# EAGLE board dsub (EAGLE 9.5.1)
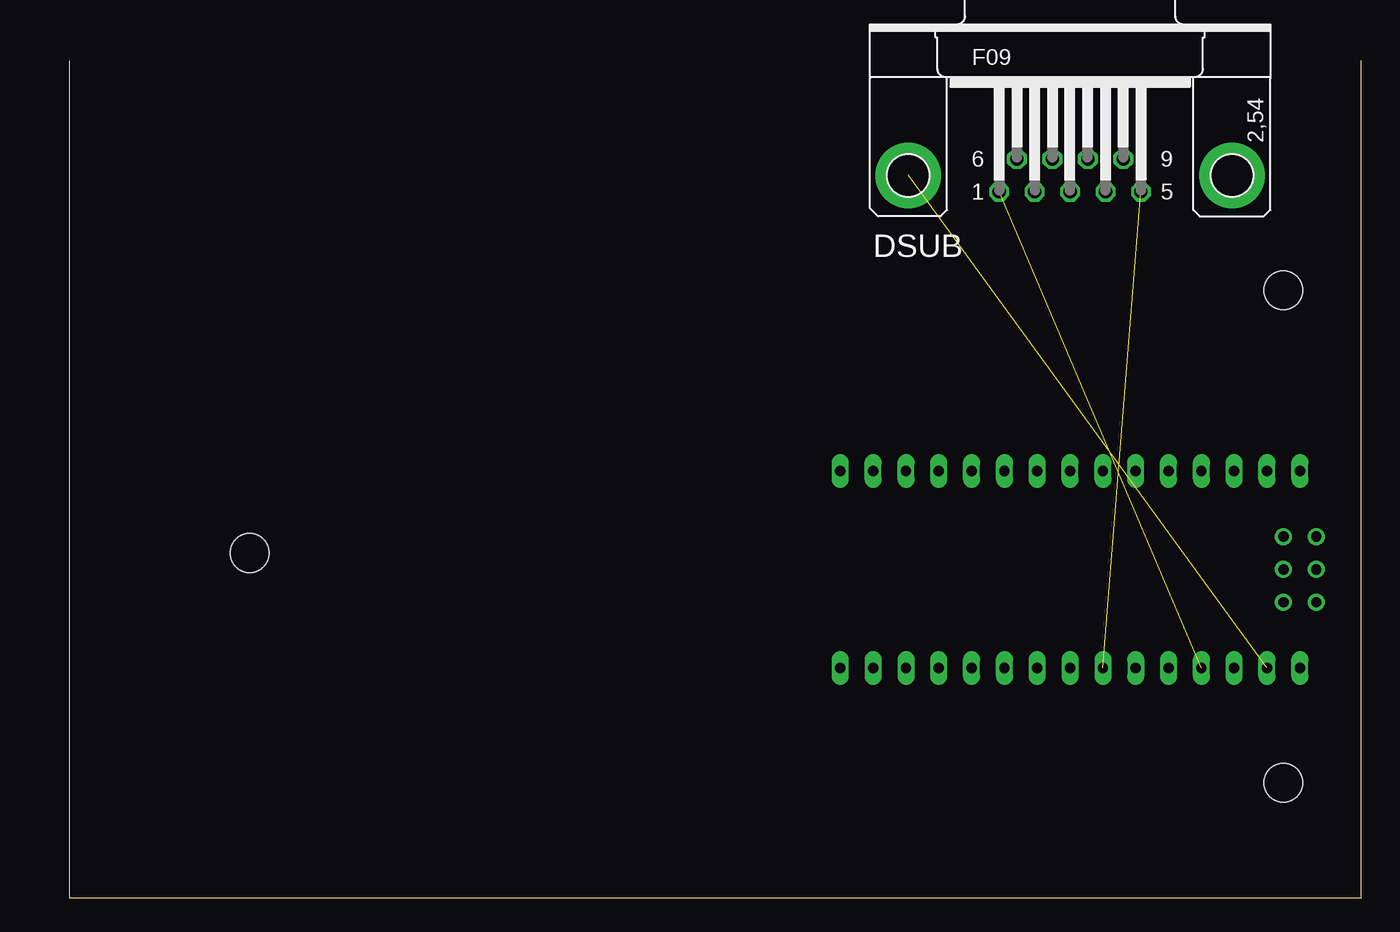
[diagram p0: board, top side]
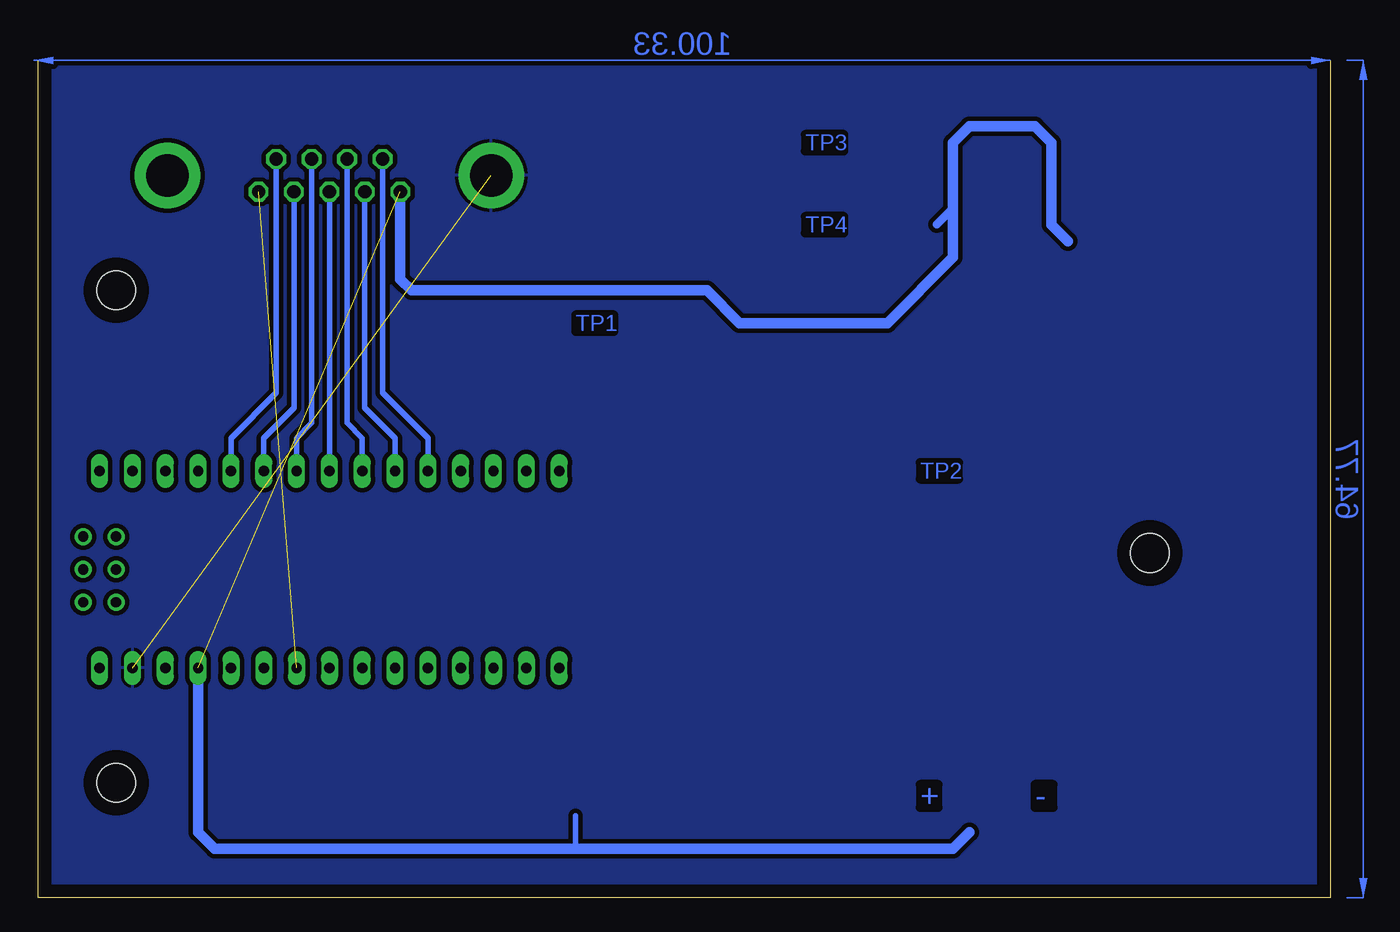
[diagram p1: board, bottom side, seen from below]

Size 100 x 64.76 mm. Coordinates in mm from the lower left corner, seen from the top.
Outline: 100,64.76 100,0 0,0 0,64.76
Copper layers (1*16): Top 0.035mm / dielectric 1.5mm / Bottom 0.035mm
Design rules "default *": minimum track width 6mil, minimum drill 0.35mm, track to track 6mil, track to pad 6mil, pad to pad 6mil, via to via 6mil, smd to smd 6mil, copper to edge 40mil, drill to drill 6mil, minimum pad ring 10mil, minimum via ring 8mil, stop-mask expansion 4mil, vias tented up to drill 0mil, thermal gap 10mil
Holes 3 mm at 13.97,26.67 93.98,8.89 93.98,46.99

## Footprints (pad centres in the part's own frame; a part is rotated, then mirrored left to right if it is on the bottom)
F09HP = drill 1.016 octagon: 1 -5.486,-1.27; 2 -2.743,-1.27; 3 0,-1.27; 4 2.743,-1.27; 5 5.486,-1.27; 6 -4.115,1.27; 7 -1.372,1.27; 8 1.372,1.27; 9 4.115,1.27 | drill 3.302 pad 5.08: G1 -12.522,0; G2 12.522,0
NANO = drill 0.8 long: 3.3V -10.16,24.13; 5V -10.16,-1.27; A0 -10.16,19.05; A1 -10.16,16.51; A2 -10.16,13.97; A3 -10.16,11.43; A4 -10.16,8.89; A5 -10.16,6.35; A6 -10.16,3.81; A7 -10.16,1.27; AREF -10.16,21.59; D2 5.08,1.27; D3 5.08,3.81; D4 5.08,6.35; D5 5.08,8.89; D6 5.08,11.43; D7 5.08,13.97; D8 5.08,16.51; D9 5.08,19.05; D10 5.08,21.59; D11 5.08,24.13; D12 5.08,26.67; D13 -10.16,26.67; GND -10.16,-6.35; GND1 5.08,-1.27; RAW -10.16,-8.89; RST -10.16,-3.81; RST1 5.08,-3.81; RX1 5.08,-6.35; TX0 5.08,-8.89 | drill 0.8: ICSP1 -5.08,-10.16; ICSP2 -5.08,-7.62; ICSP3 -2.54,-10.16; ICSP4 -2.54,-7.62; ICSP5 0,-10.16; ICSP6 0,-7.62

## Placement (x,y rotation side)
DSUB  [F09HP]  77.47,55.88 0 top
U$1  NANO  [NANO]  86.36,27.94 90 top

## Library data of the parts
DSUB = con-subd; OC_FARNELL: unknown; OC_NEWARK: unknown
U$1 = Arduino-clone

## Nets
GND: DSUB.G1 U$1.GND
N$1: DSUB.5 U$1.A5
N$10: DSUB.2 U$1.D7
N$11: DSUB.7 U$1.D6
N$12: DSUB.3 U$1.D5
N$13: DSUB.8 U$1.D4
N$14: DSUB.4 U$1.D3
N$15: DSUB.9 U$1.D2
N$16: DSUB.6 U$1.D8
VCC: DSUB.1 U$1.5V

## Tracks (layer width: path | path; a pad name or v marks a point on that pad's centre or on a via)
GND  (1 unrouted)
  pour Bottom (isolate 0.35): 0,64.77 100.33,64.77 100.33,0 0,0
N$1  (1 unrouted)
N$10
  Bottom 0.406: DSUB.2 74.73,37.9 72.39,35.56 U$1.D7
N$11
  Bottom 0.406: DSUB.7 76.1,36.73 74.93,35.56 U$1.D6
N$12
  Bottom 0.406: U$1.D5 DSUB.3
N$13
  Bottom 0.406: DSUB.8 78.84,36.73 80.01,35.56 U$1.D4
N$14
  Bottom 0.406: DSUB.4 80.21,37.9 82.55,35.56 U$1.D3
N$15
  Bottom 0.406: DSUB.9 81.58,39.06 85.09,35.56 U$1.D2
N$16
  Bottom 0.406: DSUB.6 73.36,39.06 69.85,35.56 U$1.D8
VCC  (1 unrouted)
  Bottom 0.406: 58.42,6.35 58.42,3.81
  Bottom 0.61: 30.48,52.07 29.21,53.34
  Bottom 0.813: 27.94,5.08 29.21,3.81 58.42,3.81 86.36,3.81 87.63,5.08 U$1.5V | DSUB.1 71.98,47.85 71.12,46.99 48.26,46.99 45.72,44.45 34.29,44.45 29.21,49.53 29.21,53.34 29.21,58.42 27.94,59.69 22.86,59.69 21.59,58.42 21.59,52.07 20.32,50.8
(copper drawn outside any net)
  shapes: Bottom area x2

## Text on the board
Bottom: TP3 | TP4 | TP1 | TP2 | - | +